# Altium PCB Control_Board_Model_C201_FFC_Sens_Conn.PcbDoc (part 12 of 12)
Units mil, origin at the board's own origin, x right, y up, seen from the top; angles counter-clockwise.
Board outline 3937.01 x 2755.91 mil, 6 copper layers (1-SIG-TOP, 2-GND, 3-PWR, 4-SIG-HOR, 5-SIG-VERT, 6-GND-BOT), stack 46.063 mil thick; 497 components, 379 nets, 1804 pads, 1610 vias.
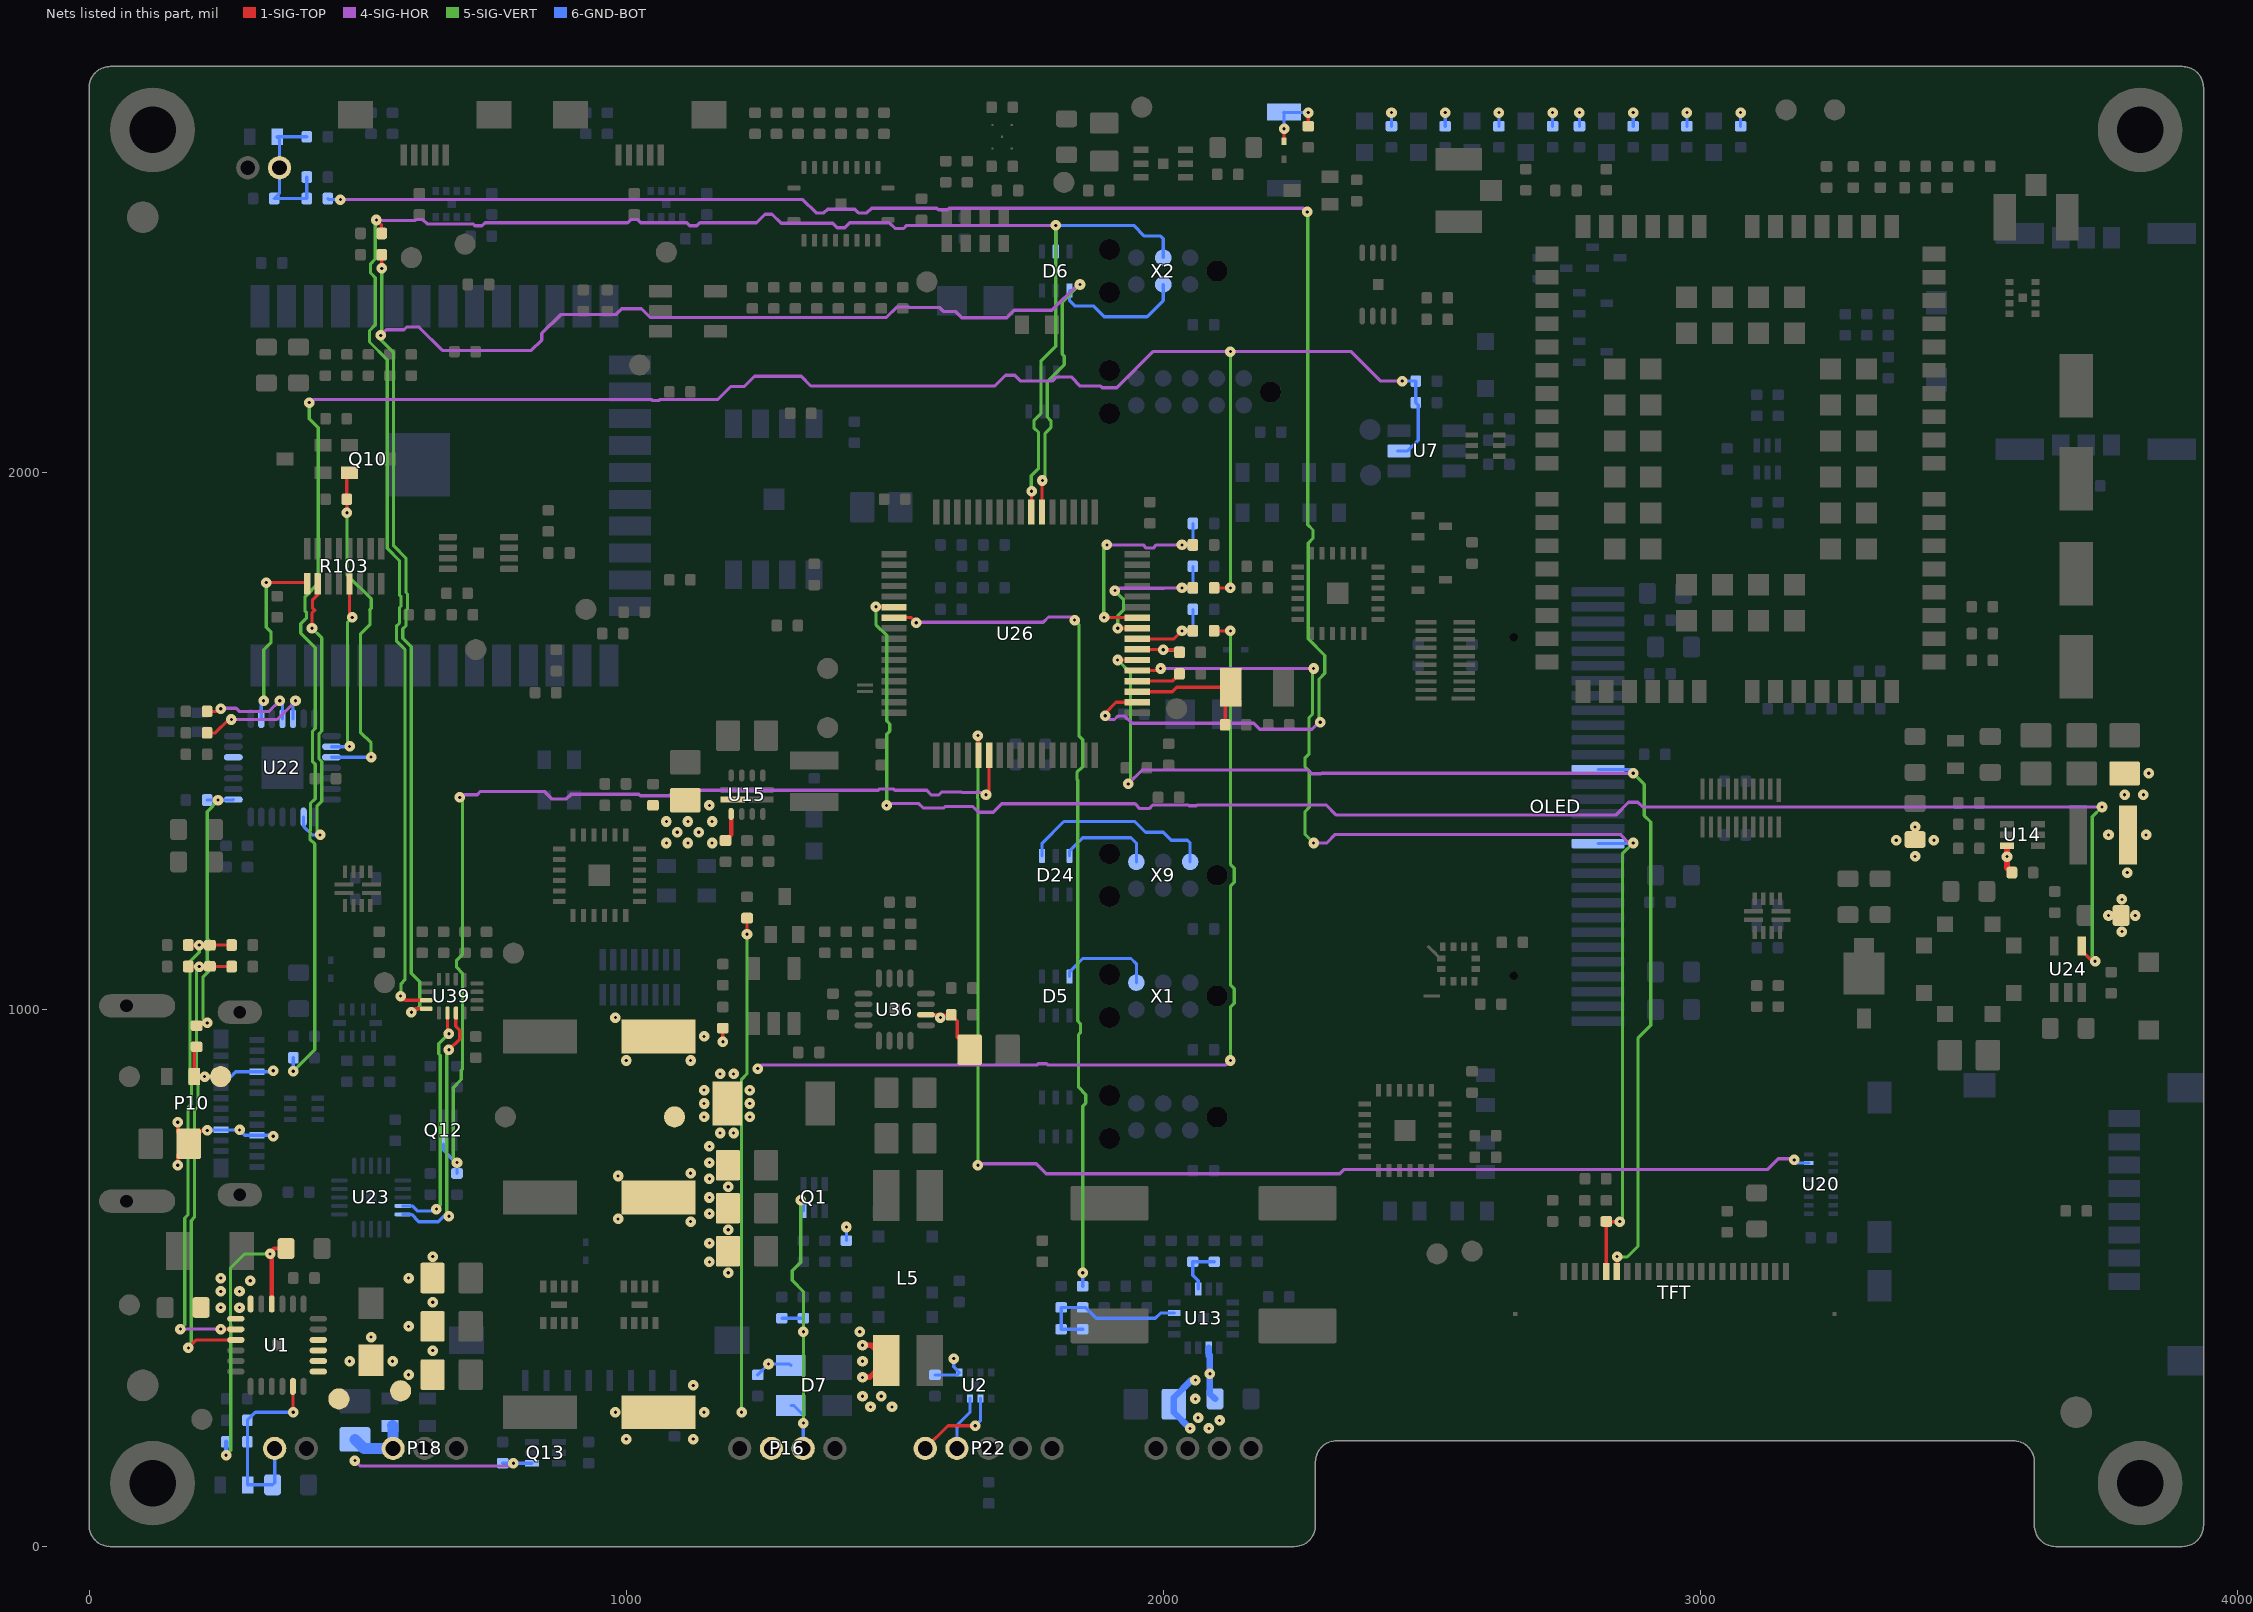
[diagram p11: the nets of this part, all layers, seen from the top]

## Via types
v1: diameter 19.68, hole 5.91, 1-SIG-TOP to 6-GND-BOT, tented both sides, 1553 vias
v2: diameter 23.81, hole 11.81, 1-SIG-TOP to 6-GND-BOT, tented both sides, 27 vias
v3: diameter 23.82, hole 11.81, 1-SIG-TOP to 6-GND-BOT, tented both sides, 26 vias
v4: diameter 21.65, hole 7.87, 1-SIG-TOP to 6-GND-BOT, tented both sides, 4 vias

## Nets (pads, with @x,y where several pads share a name; then routed paths per layer and width w, separated by ;. In a path a pad name is that pad's centre, name@x,y a point inside that pad or via, vN(x,y) a via of type N, cw(c..) or ccw(c..) an arc to the next point about the centre after c; other vN are vias at no path point) (continued)
PC0: C110.2 R134.2 R137.2 U26.8 | length 170.5
  1-SIG-TOP w6: U26.8@1951.38,1690.16 1951.54,1690 2020,1690 v1(2035,1705) R134.2@2055.31,1705
  6-GND-BOT w6: v1(2035,1705) R137.2@2055.31,1705 C110.2@2055.31,1745
PC1: C109.2 R133.2 R136.2 U26.9 | length 325.4
  1-SIG-TOP w6: v1(1915.16,1709.84) U26.9@1951.38,1709.84 ; v1(2035,1785) R133.2@2055.31,1785
  4-SIG-HOR w6: v1(1910,1780) 1914.69,1784.69 1915.18,1784.2 2001.54,1784.2 2002.34,1785 v1(2035,1785)
  5-SIG-VERT w6: v1(1910,1780) 1925.8,1764.2 1925.8,1743.46 1915.16,1732.82 v1(1915.16,1709.84)
  6-GND-BOT w6: v1(2035,1785) C109.2@2055.31,1785 R136.2@2055.31,1825
PC2: C111.2 R139.2 R140.2 U26.10 | length 424.8
  1-SIG-TOP w6: v1(1890,1730) 1950.91,1730 U26.10@1951.38,1729.53 ; v1(2035,1865) R139.2@2055.31,1865
  4-SIG-HOR w6: v1(1895,1865) 1962.66,1865 1968.46,1859.2 1981.54,1859.2 1987.34,1865 v1(2035,1865)
  5-SIG-VERT w6: v1(1890,1730) 1889.16,1730.84 1889.16,1859.16 v1(1895,1865)
  6-GND-BOT w6: v1(2035,1865) R140.2@2055.31,1865 C111.2@2055.31,1905
PC4: D6.1 R13.2 U26.22 U39.8 X2.3 | length 3637.8
  1-SIG-TOP w6: R13.2@544.69,2405 545,2405.32 v1(545,2380) ; v1(600,995) 606.38,1001.38 U39.8@627.76,1001.38 ; U26.22@1774.21,1926.38 1774.21,1984.21 v1(1775,1985)
  4-SIG-HOR w6: v1(542.91,2255.15) 553.6,2265.84 586.37,2265.84 591.37,2270.84 614.16,2270.84 657.84,2227.16 823.6,2227.16 842.84,2246.4 842.84,2258.9 877.94,2294 980.58,2294 991.43,2304.84 1028.57,2304.84 1044.91,2288.51 1484.2,2288.51 1503.49,2307.8 1526.51,2307.8 1527.07,2307.24 1583.33,2307.24 1590.74,2299.83 1612.71,2299.83 1624.54,2288 1708.67,2288 1722.5,2301.83 1792.68,2301.83 1792.78,2301.72 1841.06,2350 v1(1845,2350)
  5-SIG-VERT w6: v1(545,2380) 545,2257.24 v1(542.91,2255.15) 542.91,2247.09 567,2223 567,1863.52 590,1840.52 590,1776.45 592.84,1773.6 592.84,1746.4 590,1743.55 590,1714.48 584.16,1708.63 584.16,1691.37 600,1675.52 600,1067.34 615.8,1051.54 615.8,1005.8 605,995 v1(600,995) ; v1(1775,1985) 1780,1990 1780,2072.66 1790.8,2083.46 1790.8,2096.54 1784.18,2103.16 1784.18,2169.18 1815.8,2200.8 1815.8,2216.54 1812,2220.34 1812,2317 v1(1845,2350)
  6-GND-BOT w6: v1(1845,2350) 1833.78,2338.78 D6.1@1825.59,2338.78 1825.59,2319.41 1835,2310 1870,2310 1890,2290 1970,2290 2000,2320 X2.3@2000,2350
PC5: D6.5 R12.2 U26.23 U39.7 X2.4 | length 3740.8
  1-SIG-TOP w6: v1(535,2470) 544.69,2460.32 R12.2@544.69,2445 ; v1(580,1025) 587.87,1017.13 U39.7@627.76,1017.13 ; U26.23@1754.53,1926.38 1754.53,1964.53 v1(1755,1965)
  4-SIG-HOR w6: v1(535,2470) 536.05,2468.95 606.61,2468.95 608.46,2470.8 621.54,2470.8 629.5,2462.84 714.82,2462.84 718.46,2459.2 731.54,2459.2 737.34,2465 1002.66,2465 1008.46,2470.8 1021.54,2470.8 1027.34,2465 1112.66,2465 1118.46,2459.2 1131.54,2459.2 1137.34,2465 1242.66,2465 1258.46,2480.8 1271.54,2480.8 1288.51,2463.83 1384.88,2463.83 1393.05,2455.66 1406.95,2455.66 1416.29,2465 1490,2465 1500.8,2454.2 1516.54,2454.2 1522.34,2460 v1(1800,2460)
  5-SIG-VERT w6: v1(535,2470) 533,2468 533,2397.48 524.16,2388.63 524.16,2371.37 533,2362.52 533,2274.72 522.07,2263.79 522.07,2242.93 555,2210 555,1858.55 578,1835.55 578,1771.48 580.84,1768.63 580.84,1751.37 578,1748.52 578,1719.45 572.16,1713.6 572.16,1686.4 588,1670.55 588,1055.34 580.84,1048.18 580.84,1025.84 v1(580,1025) ; v1(1755,1965) 1754.16,1965.84 1754.16,1994.16 1768,2008 1768,2074.34 1759.2,2083.13 1759.2,2096.54 1772.18,2109.51 1772.18,2207.18 1800,2235 v1(1800,2460)
  6-GND-BOT w6: D6.5@1800,2411.22 v1(1800,2460) 1945,2460 1965,2440 1995,2440 2000,2435 X2.4@2000,2400
PC6: U24.4 U26.38 | length 3064.4
  1-SIG-TOP w6: v1(1465,1750) 1465.79,1749.21 U26.38@1498.62,1749.21 ; U24.4@3710.59,1118.31 3710.59,1109.41 3730,1090 v1(3735,1090)
  4-SIG-HOR w6: v1(1485,1380) 1488.8,1383.8 1544.23,1383.8 1552.82,1375.2 1591.48,1375.2 1594.28,1378 1645.55,1378 1656.4,1367.16 1683.6,1367.16 1699.45,1383 1947.52,1383 1956.37,1374.16 1973.63,1374.16 1980.32,1380.84 2046.82,1380.84 2048.46,1379.2 2061.54,1379.2 2063.18,1380.84 2303.63,1380.84 2322.48,1362 2842.52,1362 2866.37,1385.84 2883.63,1385.84 2892.48,1377 v1(3748,1377)
  5-SIG-VERT w6: v1(1465,1750) 1465,1716.65 1485,1696.65 1485,1537.34 1490.8,1531.54 1490.8,1518.46 1485,1512.66 v1(1485,1380) ; v1(3735,1090) 3730,1095 3730,1359 v1(3748,1377)
PC7: R78.2 U26.39 | length 1611.3
  1-SIG-TOP w6: U26.39@1498.62,1729.53 1499.09,1730 1530,1730 v1(1540,1720)
  4-SIG-HOR w6: v1(1540,1720) 1541.05,1721.05 1776.57,1721.05 1786.37,1730.84 1829.16,1730.84 v1(1835,1725)
  5-SIG-VERT w6: v1(1835,1725) 1843,1717 1843,1509.66 1850,1502.66 1850,1452.34 1839.2,1441.54 1839.2,1428.46 1840.8,1426.87 1840.8,978.68 1845.84,973.63 1845.84,956.37 1842,952.52 1842,854.9 1842.43,854.9 1855.8,841.54 1855.8,825.8 1850,820 v1(1850,510)
  6-GND-BOT w6: R78.2@1850,484.68 v1(1850,510)
PC11: U20.7 U26.53 | length 2408.7
  1-SIG-TOP w6: v1(1655,1510) 1656.1,1508.9 U26.53@1656.1,1473.62
  4-SIG-HOR w6: v1(1655,710) 1657.84,712.84 1763.6,712.84 1782.29,694.16 2328.63,694.16 2336.32,701.84 3124.5,701.84 3144.93,722.28 3172.72,722.28 v1(3175,720)
  5-SIG-VERT w6: v1(1655,710) 1655,1392.66 1654.2,1393.46 1654.2,1406.54 1655,1407.34 v1(1655,1510)
  6-GND-BOT w6: v1(3175,720) 3180.63,714.37 U20.7@3202.36,714.37
PC12: Q12.5 R115.2 U26.54 | length 1853.6
  1-SIG-TOP w6: v1(1670,1400) 1675.79,1405.79 U26.54@1675.79,1473.62
  4-SIG-HOR w6: v1(690,1395) 694.99,1399.99 722.77,1399.99 728.78,1406 847.55,1406 861.4,1392.16 888.6,1392.16 897.45,1401 1023.61,1401 1026.46,1398.16 1080.13,1398.16 1090.13,1408.16 1469.56,1408.16 1472.23,1410.83 1497.77,1410.83 1500.44,1408.16 1559.5,1408.16 1568.46,1399.2 1581.54,1399.2 1587.34,1405 1624.24,1405 1625.07,1404.17 1665.83,1404.17 v1(1670,1400)
  5-SIG-VERT w6: v1(685,715) 677.83,722.17 677.83,854.45 693,869.63 693,886.6 695,888.6 695,1067.66 684.2,1078.46 684.2,1091.54 695,1102.34 695,1390 v1(690,1395)
  6-GND-BOT w6: Q12.5@660,749.8 660,737.67 682.67,715 v1(685,715) R115.2@685,694.68
PC13: R29.1 U26.2 | length 3321.2
  1-SIG-TOP w6: v1(1891.98,1546.98) 1891.98,1551.98 1912.05,1572.05 U26.2@1951.38,1572.05
  4-SIG-HOR w6: v1(468,2508) 1328.9,2508 1353.68,2483.22 1368.22,2483.22 1375,2490 1425.64,2490 1432.42,2483.22 1448.22,2483.22 1457,2492 1578.52,2492 1581.37,2489.16 1598.63,2489.16 1601.48,2492 2261.31,2492 v1(2268.31,2485) ; v1(1891.98,1546.98) 1898.95,1540 1909.31,1540 1915.58,1546.27 1928.67,1546.27 1942.1,1532.84 2168.6,1532.84 2179.45,1522 2277,1522 2290,1535 v1(2292.5,1535)
  5-SIG-VERT w6: v1(2268.31,2485) 2269.16,2484.16 2269.16,1902.49 2278.84,1892.8 2278.84,1877.2 2270,1868.35 2270,1690 2300.84,1659.16 2300.84,1625.84 2290,1615 2290,1535 v1(2292.5,1535)
  6-GND-BOT w6: R29.1@444.69,2510 446.69,2508 v1(468,2508)
PC14: C12.2 U26.3 X3.1 | length 252.2
  1-SIG-TOP w6: U26.3@1951.38,1591.73 2016.73,1591.73 2025,1600 X3.1@2125.79,1600 2115.31,1589.53 C12.2@2115.31,1530
PC15: R20.2 U26.4 | length 84.6
  1-SIG-TOP w6: U26.4@1951.38,1611.42 2016.73,1611.42 R20.2@2030.31,1625
PF0: OLED.13 R7.2 TFT.18 U26.5 | length 2182.6
  1-SIG-TOP w6: U26.5@1951.38,1631.1 1991.1,1631.1 v1(1995,1635) ; TFT.18@2824.8,511.81 2824.8,604.88 2824.68,605 v1(2850,605)
  4-SIG-HOR w6: v1(1995,1635) v1(2280,1635) ; v1(2280,1310) 2304.48,1310 2320.48,1326 2851.14,1326 2867.14,1310 v1(2875,1310)
  5-SIG-VERT w6: v1(2280,1310) 2264.16,1325.84 2264.16,1368.63 2272,1376.48 2272,1443.52 2264.16,1451.37 2264.16,1468.63 2271.66,1476.13 2271.66,1543.63 2278,1549.98 2278,1633 v1(2280,1635) ; v1(2850,605) 2855,610 2855,1290 v1(2875,1310)
  6-GND-BOT w6: OLED.13@2809.84,1309.06 2874.06,1309.06 v1(2875,1310)
PF1: OLED.18 TFT.17 U26.6 | length 2283.7
  1-SIG-TOP w6: v1(1915,1650.79) U26.6@1951.38,1650.79 ; TFT.17@2844.49,511.81 2845,512.32 v1(2845,540)
  4-SIG-HOR w6: v1(1935,1420) 1961,1446 2269.52,1446 2276.37,1439.16 2293.63,1439.16 2294.48,1440 v1(2875,1440)
  5-SIG-VERT w6: v1(1915,1650.79) 1938.95,1626.83 1938.95,1423.95 v1(1935,1420) ; v1(2845,540) 2845.84,539.16 2863.63,539.16 2884.16,559.68 2884.16,947.19 2907.84,970.87 2907.84,1349.13 2895.84,1361.13 2895.84,1419.16 v1(2875,1440)
  6-GND-BOT w6: OLED.18@2809.84,1446.85 2873.15,1446.85 2875,1445 v1(2875,1440)
PG10: C108.1 R132.2 U26.7 | length 113.6
  1-SIG-TOP w6: U26.7@1951.38,1670.47 1999.53,1670.47 v1(2000,1670) 2025.31,1670 R132.2@2030.31,1665
  6-GND-BOT w6: v1(2000,1670) 2025.31,1670 C108.1@2030.31,1665
PIN#2_P022: D24.4 X9.2 | length 367.2
  6-GND-BOT w6: D24.4@1774.41,1286.22 1774.41,1309.41 1815,1350 1946.97,1350 1966.97,1330 2000,1330 2015,1315 2045,1315 2050,1310 X9.2@2050,1275
PIN#6_P012: D5.6 X1.6 | length 183
  6-GND-BOT w6: D5.6@1825.59,1061.22 1825.59,1070.59 1850,1095 1940,1095 1950,1085 X1.6@1950,1050
PIN#6_P022: D24.6 X9.6 | length 183
  6-GND-BOT w6: D24.6@1825.59,1286.22 1825.59,1295.59 1850,1320 1940,1320 1950,1310 X9.6@1950,1275
REF: C52.2 R78.1 R81.1 R82.2 U13.11 | length 303.6
  6-GND-BOT w6: C52.2@1850,404.68 R82.2@1810,404.68 R81.1@1810,445.32 R78.1@1850,445.32 1854.69,445.32 1875,425 1985.2,425 1995.04,434.84 U13.11@2020.47,434.84
REGN: C3.2 R3.1 U1.22 | length 589.6
  1-SIG-TOP w8: U1.22@340.16,451.18 U1.22@340.16,451.77 340.16,550.16 345,555 C3.2@366.54,555
  5-SIG-VERT w6: v1(255,170) 263.83,178.83 263.83,412.8 263.05,413.58 263.05,518.05 290,545 v1(337,545)
  6-GND-BOT w8: v1(255,170) 255.31,170.32 R3.1@255.31,195
RI/CLK: R103.2 U22.2 | length 547.8
  1-SIG-TOP w6: v1(415,1710) 415,1738.35 420,1743.35 416.16,1747.2 416.16,1762.8 425.79,1772.43 R103.2@425.79,1792.5
  5-SIG-VERT w6: v1(415,1710) 433.16,1691.84 433.16,1518.54 428.16,1513.54 428.16,1466.46 433,1461.61 433,1387.48 424.16,1378.63 424.16,1330.84 v1(430,1325)
  6-GND-BOT w6: U22.2@399.37,1358.5 399.37,1340.63 415,1325 v1(430,1325)
RXT: R105.1 U22.18 | length 184
  1-SIG-TOP w6: R105.1@219.69,1555 240,1555 v1(245,1560)
  4-SIG-HOR w6: v1(245,1560) 245.84,1560.84 273.63,1560.84 279.48,1555 335,1555 v1(355,1575)
  6-GND-BOT w6: v1(355,1575) 360,1570 U22.18@360,1541.5
SBU1: U23.15 U39.11 | length 488.9
  1-SIG-TOP w6: v1(670,925) 690,945 690,961.65 682.87,968.77 U39.11@682.87,993.5
  5-SIG-VERT w6: v1(670,615) 665.83,619.17 665.83,920.83 v1(670,925)
  6-GND-BOT w6: U23.15@584.06,618.5 600.5,618.5 614,605 650,605 660,615 v1(670,615)
SBU2: U23.14 U39.10 | length 447.7
  1-SIG-TOP w6: U39.10@667.13,993.5 667.13,957.13 670,954.25 v1(670,955)
  5-SIG-VERT w6: v1(646.68,628.32) 647,628.32 653.83,635.15 653.83,914.55 651.17,917.2 651.17,936.17 v1(670,955)
  6-GND-BOT w6: U23.14@584.06,634.25 601.72,634.25 610.97,625 643.35,625 v1(646.68,628.32)
SCL_OUT: P22.1 U2.2 | length 165.7
  1-SIG-TOP w6: P22.1@1556.89,182.68 1599.21,225 v1(1650,225)
  6-GND-BOT w6: v1(1650,225) 1659.84,234.84 U2.2@1659.84,275.98
SDA_OUT: P22.2 U2.3 | length 103.3
  6-GND-BOT w6: P22.2@1615.94,182.68 1615.94,225.94 1640.16,250.16 U2.3@1640.16,275.98
SENSE: D7.3 P16.3 Q1.6 R22.2 R25.2 | length 614.9
  5-SIG-VERT w6: v1(1325,645) 1325,529.48 1309.16,513.63 1309.16,495.84 1330,475 v1(1330,400) v1(1330,230)
  6-GND-BOT w6: R25.2@1290,425.32 R22.2@1330,425.32 v1(1330,400) ; D7.3@1306.69,262.6 1312.4,262.6 1330,245 v1(1330,230) 1329.53,230.47 P16.3@1329.53,182.68 ; v1(1325,645) 1330,645 1330.31,644.68 Q1.6@1330.31,624.8
STBY/R\E\S\E\T\: C51.2 R79.1 U13.14 | length 95
  6-GND-BOT w6: U13.14@2065.16,479.53 2065.16,494.84 2055,505 R79.1@2055,530.32 C51.2@2095,530.32
SUSP: U22.12
TAMP+: C20.1 D9.1 R28.2 R29.2 R30.1 X4.1 | length 277.5
  6-GND-BOT w6: R30.1@405.31,2550 R29.2@405.31,2510 C20.1@344.69,2510 354.53,2519.84 X4.1@354.53,2567.32 354.53,2620.08 349.61,2625 D9.1@350.59,2625 R28.2@405.31,2625
TS: D2.1 P19.1 P19.1.1 R2.2 R3.2 U1.11 | length 376.2
  1-SIG-TOP w6: U1.11@379.53,298.82 U1.11@379.53,298.23 379.53,250.47 v1(380,250)
  6-GND-BOT w6: P19.1.1@345.47,182.68 345.47,118.94 P19.1@341.54,115 D2.1@295.59,115 294.69,115.91 R3.2@294.69,195 R2.2@294.69,235 309.69,250 v1(380,250)
TXT: R104.1 U22.19 | length 225.3
  1-SIG-TOP w6: R104.1@219.69,1515 235,1515 260,1540 v1(265,1540)
  4-SIG-HOR w6: v1(265,1540) 350,1540 384.32,1574.32 v1(384.32,1575)
  6-GND-BOT w6: U22.19@379.69,1541.5 379.69,1570.37 v1(384.32,1575)
UART0.CTS: R103.5 U22.23 | length 352.4
  1-SIG-TOP w6: R103.5@484.84,1792.5 484.84,1735.16 v1(490,1730)
  5-SIG-VERT w6: v1(485,1490) 481.16,1493.84 481.16,1721.16 v1(490,1730)
  6-GND-BOT w6: U22.23@451.5,1489.37 489.37,1489.37 488.74,1490 v1(485,1490)
UART0.RTS: Q10.2 R63.1 U22.24 | length 650.2
  1-SIG-TOP w6: v1(480,1925) 480,1949.68 R63.1@479.69,1950 479.69,1994.53 Q10.2@484.57,1999.42
  5-SIG-VERT w6: v1(480,1925) 480,1809.85 525.37,1764.48 525.37,1746.84 522.49,1743.96 522.84,1743.6 522.84,1716.4 505.16,1698.71 505.16,1516.29 525,1496.45 v1(525,1470)
  6-GND-BOT w6: U22.24@451.5,1469.68 529.69,1469.68 529.37,1470 v1(525,1470)
USB4.D_N: R118.2 R119.2 R120.1 U1.3 | length 896.3
  1-SIG-TOP w6: R119.2@184.69,1080 v1(205,1080) R120.1@265.31,1080 ; v1(185,370) 199.84,384.84 U1.3@273.23,384.84
  5-SIG-VERT w6: v1(185,370) 190.17,375.17 190.17,606.8 196.17,612.8 196.17,812.8 202.8,819.42 202.8,864.87 199.2,868.46 199.2,881.54 200,882.34 200,1075 v1(205,1080)
USB4.D_P: R116.2 R117.1 R118.1 U1.2 | length 918
  1-SIG-TOP w6: R116.2@184.69,1120 v1(205,1120) R117.1@265.31,1120 ; v1(245,405) 245.47,404.53 U1.2@273.23,404.53
  4-SIG-HOR w6: v1(170,405) v1(245,405)
  5-SIG-VERT w6: v1(170,405) 178.17,413.17 178.17,611.77 184.17,617.77 184.17,817.77 190.8,824.39 190.8,859.9 187.2,863.49 187.2,886.51 188,887.31 188,1070.37 186.17,1072.2 186.17,1087.8 205,1106.63 v1(205,1120)
VBAT: C5.2 D1.1 P18.1 Q13.4 R135.2 TP16.1 U1.13 U1.14 | length 477.2
  4-SIG-HOR w6: v1(495,160) 505,150 785,150 v1(790,155)
  6-GND-BOT w6: R135.2@770,155.32 789.69,155.32 v1(790,155) Q13.4@824.8,155
  6-GND-BOT w20: C5.2@495,199.57 511.89,182.68 P18.1@565.94,182.68 565.94,224.45 D1.1@565,225.39
VBUS: C1.2 C21.1 C96.1 D21.1 P10.A4 P10.A9 P10.B4 P10.B9 R42.1 R102.2 R125.1 R133.1 TP17.1 U1.1 U1.24 U7.5 | length 4649.3
  1-SIG-TOP w6: v1(165,710) 165,729.57 C96.1@185.43,750 ; v1(165,790) 165,770.43 C96.1@185.43,750 ; R102.2@200,930.32 195.59,925.91 D21.1@195.59,875 v1(215,875) TP17.1@245,875 ; v1(220,775) 210.43,775 C96.1@185.43,750 ; U1.24@300.79,451.77 U1.24@300.79,460.79 ; R133.1@2094.69,1785 v1(2125,1785)
  4-SIG-HOR w6: v1(410,2130) 416.05,2136.05 1046.61,2136.05 1048.46,2134.2 1061.54,2134.2 1063.39,2136.05 1171.05,2136.05 1195,2160 1220,2160 1239,2179 1326,2179 1344,2161 1686.52,2161 1706.37,2180.84 1723.63,2180.84 1734.48,2170 1793.03,2170 1800.87,2177.84 1828.6,2177.84 1845.6,2160.84 1883.42,2160.84 1886.6,2157.66 1913.4,2157.66 1980.74,2225 v1(2125,2225) 2350,2225 2405,2170 v1(2445,2170)
  5-SIG-VERT w6: v1(380,885) 420,925 420,1308.37 411.17,1317.2 411.17,1332.8 412.16,1333.78 412.16,1383.6 421,1392.45 421,1456.64 416.16,1461.48 416.16,1518.52 421.16,1523.52 421.16,1673.84 394.16,1700.84 394.16,1718.63 405,1729.48 405,1738.55 402.16,1741.4 402.16,1768.6 426.84,1793.29 426.84,2083.16 410,2100 v1(410,2130) ; v1(2125,1785) v1(2125,2225)
  6-GND-BOT w6: v1@211.57,875 v1(215,875) ; v1@215,874.21 P10.B4@245.67,874.21 263.21,874.21 273.06,884.06 P10.A9@312.6,884.06 341.06,884.06 v1(343,886) ; v1(220,775) 219.21,775.79 P10.B9@245.67,775.79 v1(280.16,775.79) 290,765.94 P10.A4@312.6,765.94 341.06,765.94 v1(343,764) ; v1(380,885) 380.31,885.32 R125.1@380.31,910 ; U7.5@2436.85,2040.01 U7.5@2438.82,2040.01 2455.01,2040.01 2475,2060 2475,2125.32 C21.1@2470.32,2130 R42.1@2470.32,2170 v1(2445,2170)
  other v1: 245,445 280,445 245,475 280,475 300,495 245,500
VBUS_IN: R102.1 R107.1 U22.8 | length 508.3
  1-SIG-TOP w6: R102.1@200,969.68 205.31,975 v1(220,975)
  5-SIG-VERT w6: v1(220,975) 212,983 212,1060.37 223.83,1072.2 223.83,1087.8 220,1091.63 220,1108.37 223.83,1112.2 223.83,1127.8 220,1131.63 220,1368.41 240.8,1389.2 v1(240,1390)
  6-GND-BOT w6: R107.1@219.69,1390 v1(240,1390) 267.56,1390 U22.8@268.5,1390.94
VFAN: C13.1 C14.1 C15.1 C136.2 C137.2 C138.2 D23.1 P16.2 R134.1 R168.2 TP11.1 | length 2654.8
  1-SIG-TOP w6: v1(1225,1140) R168.2@1225,1170.32 ; R134.1@2094.69,1705 v1(2125,1705)
  4-SIG-HOR w6: v1(1245,890) 1251.84,896.84 1765.22,896.84 1767.2,898.83 1782.8,898.83 1784.78,896.84 2116.84,896.84 v1(2125,905)
  5-SIG-VERT w6: v1(1215,250) 1215,870 1225,880 v1(1225,1140) ; v1(2125,905) 2125,1004.26 2132.34,1011.6 2132.34,1038.4 2125,1045.74 2125,1229.26 2132.34,1236.6 2132.34,1263.4 2125,1270.74 v1(2125,1705)
  other v1: 1000,200 1125,200 980,250 1145,250 1125,300 1190,510 1155,530 1155,565 1190,590 1120,605 985,610 1155,620 1155,650 1190,670 1155,685 985,690 1120,695 1155,715 1155,745 1175,770 1200,770 1145,800 1230,800 1145,825 1230,825 1145,850 1230,850 1175,880 1200,880 1000,905 1120,905 1145,950 980,985
VSYS: C6.2 C7.2 C8.2 C17.1 C18.2 C19.1 C54.1 C55.1 C57.1 C58.1 C61.1 C62.2 C130.2 C131.2 D7.4 D8.1 FB1.2 FB4.1 FB6.1 L1.2 L2.1 L5.3 P24.1 R27.1 R32.2 R33.2 R34.2 R35.2 R43.2 R44.2 R45.1 R46.2 R96.2 TP15.1 U1.15 U1.16 U2.5 U13.6 U14.3 U15.7 U15.8 U36.2 | length 1116.4
  1-SIG-TOP w6: v1(1180,940) FB6.1@1180,965.32 FB6.1@1180,967.28 ; U36.2@1558.07,990.16 1578.07,990.16 1583.23,985 v1(1585,985) v1@1585,990 ; v1@1587.5,987.5 v1@1585,990 ; C130.2@1639.57,925 1616.66,947.91 1616.66,978.66 C131.2@1605.31,990 v1@1585,990 ; D8.1@2225,2616.54 v1(2225,2640) ; C19.1@2270,2644.68 v1(2270,2670)
  1-SIG-TOP w8: C62.2@1185,1314.68 1195.47,1325.16 U15.8@1195.47,1364.07
  1-SIG-TOP w10: v1(1440,315) 1453.19,315 L5.3@1484.65,346.46 1456.1,375 v1(1440,375)
  1-SIG-TOP w12: U14.3@3571.06,1305.32 v1(3571.06,1284.78) 3571.06,1264.25 C58.1@3580.32,1255
  6-GND-BOT w6: C18.2@1245,319.68 1245,320 v1(1265,340) 1304.1,340 D7.4@1306.69,337.41 ; R27.1@1410,569.68 v1(1410,595) ; C17.1@1575,319.68 1616.14,319.68 U2.5@1620.47,324.02 1610,334.49 v1(1610,350) ; P24.1@2224.13,2670 P24.1@2225,2670.87 P24.1@2225,2670 ; v1(2225,2640) P24.1@2225,2670 ; v1(2270,2670) P24.1@2225,2670 ; R35.2@2425,2644.68 v1(2425,2670) ; R34.2@2525,2644.68 v1(2525,2670) ; R33.2@2625,2644.68 v1(2625,2670) ; R32.2@2725,2644.68 v1(2725,2670) ; R45.1@2775,2644.68 v1(2775,2670) ; R44.2@2875,2644.68 v1(2875,2670) ; R43.2@2975,2644.68 v1(2975,2670) ; R46.2@3075,2644.68 v1(3075,2670)
  6-GND-BOT w12: v1(2050,220) 2019.85,250.15 C54.1@2019.85,265 2019.85,277.19 2052.65,310 v1(2060,310) ; U13.6@2084.84,370.47 2084.84,354.88 2086.62,356.66 2086.62,349.27 2086.84,349.05 v1(2086.84,321.84) 2086.84,284.69 C55.1@2096.54,275
  other v1: 2085,220 2105,235 2065,240 1455,260 1495,260 2060,275 1440,280 1475,280 595,320 485,345 565,345 1440,345 640,365 525,390 1435,400 595,410 640,455 595,500 640,540 3785,1145 3760,1175 3810,1175 3785,1205 3795,1255 3400,1285 1075,1310 1115,1310 1160,1310 3365,1315 3435,1315 3760,1325 3830,1325 1095,1330 1135,1330 3400,1340 1075,1350 1115,1350 1160,1350 1155,1380 3790,1400 3825,1400 3835,1440
WKUP: R103.1 U22.16 | length 341.8
  1-SIG-TOP w6: v1(330,1795) 403.6,1795 R103.1@406.1,1792.5
  5-SIG-VERT w6: v1(325,1575) 325,1670 338.84,1683.84 338.84,1702.8 330,1711.65 v1(330,1795)
  6-GND-BOT w6: U22.16@320.63,1541.5 320.63,1570.63 v1(325,1575)
pads on no net: ESP32_MOD.32 FID1. FID2. FID3. OLED.0 OLED.7 P10.A2 P10.A3 P10.A10 P10.A11 P10.B2 P10.B3 P10.B10 P10.B11 R103.7 U1.8 U2.4 U6.2 U6.4 U6.5 U6.6 U6.7 U6.11 U6.12 U6.13 U6.14 U6.16 U6.24 U6.25 U6.26 U6.40 U6.41 U6.42 U6.51 U6.56 U6.57 U6.63 U6.64 U6.65 U6.66 U6.76 U6.77 U6.78 U6.83 U6.84 U6.85 U6.86 U6.87 U6.88 U6.92 U6.93 U6.94 U6.95 U6.97 U6.98 U6.99 U8.4 U9.4 U10.11 U10.12 U10.S5 U11.4 U12.4 U15.5 U20.2 U22.10 U22.13 U22.14 U22.15 U22.17 U22.20 U22.21 U22.22 U25.4 U32.4 U34.1 U34.2 U34.3 U34.7 U39.13 X1.0 X2.0 X8.0 X8.7 X8.9 X9.0 X10.0

## Polygon pours and split planes (outlines as drawn)
GND on 1-SIG-TOP "GND_L01_P112" (solid, pour order 112): 0,2755.91 3937.01,2755.91 3937.01,0 0,0
VBUS on 1-SIG-TOP "VBUS_L01_P107" (solid, pour order 107): 175,510 310,510 310,415 240,415 240,405 175,405
VFAN on 1-SIG-TOP "VFAN_L01_P108" (solid, pour order 108): 1125,500 1225,500 1225,765 1250,765 1250,900 1160,900 1160,1000 950,1000 950,600 1125,600
VSYS on 1-SIG-TOP "VSYS_L01_P103" (solid, pour order 103): 3350,1350 3450,1350 3450,1275 3350,1275
NetC59_2 on 1-SIG-TOP "NETC59_2_L01_P089" (solid, pour order 89): 3370,1480 3755,1480 3755,1400 3660,1400 3660,1335 3600,1335 3600,1375 3445,1375 3445,1355 3370,1355
NetL2_2 on 1-SIG-TOP "NETL2_2_L01_P088" (solid, pour order 88): 3625,1315 3670,1315 3670,1255 3735,1255 3735,1395 3670,1395 3670,1335 3625,1335
LCD_BL_A on 1-SIG-TOP "LCD_BL_A_L01_P097" (solid, pour order 97): 3380,1035 3380,1200 3225,1200 3225,1035
NetC92_2 on 1-SIG-TOP "NETC92_2_L01_P092" (solid, pour order 92): 3400,950 3400,870 3500,870 3500,1000 3435,1065 3385,1065 3385,1025 3275,1025 3275,950
NetC134_2 on 1-SIG-TOP "NETC134_2_L01_P094" (solid, pour order 94): 1520,890 1315,890 1315,750 1425,750 1425,590 1520,590
+3V3 on 1-SIG-TOP "+3V3_L01_P081" (solid, pour order 81): 1250,1560 1250,1420 1415,1420 1415,1560
NetR90_2 on 1-SIG-TOP "NETR90_2_L01_P096" (solid, pour order 96): 2125,420 2350,420 2350,350 2175,350 2175,320.08 2125,320.08
NetR89_2 on 1-SIG-TOP "NETR89_2_L01_P095" (solid, pour order 95): 1800,420 2025,420 2025,320.08 1975,320.08 1975,350 1800,350
NetC92_1 on 1-SIG-TOP "NETC92_1_L01_P091" (solid, pour order 91): 3500,870 3585,870 3585,995 3670,995 3670,1070 3570,1070 3500,1000
NetC90_2 on 1-SIG-TOP "NETC90_2_L01_P090" (solid, pour order 90): 3500,1250 3500,1150 3575,1075 3685,1075 3685,1140 3730,1140 3730,1215 3690,1215 3690,1205 3555,1205 3555,1250
NetC26_1 on 1-SIG-TOP "NETC26_1_L01_P086" (solid, pour order 86): 3395,1710 3395,1625 3525,1625 3525,1775 3475,1775 3475,1710
NetC25_1 on 1-SIG-TOP "NETC25_1_L01_P084" (solid, pour order 84): 3205,2400 3290,2400 3290,2495 3360,2495 3360,2550 3205,2550
VSYS on 1-SIG-TOP "VSYS_L01_P100" (solid, pour order 100): 3740,1395 3760,1395 3760,1480 3840,1480 3840,1255 3740,1255
NetC26_1 on 1-SIG-TOP "NETC26_1_L01_P087" (solid, pour order 87): 3625,1910 3765,1910 3765,1725 3625,1725
NetC25_1 on 1-SIG-TOP "NETC25_1_L01_P085" (solid, pour order 85): 3625,1910 3765,1910 3765,2070 3625,2070
VSYS on 1-SIG-TOP "VSYS_L01_P105" (solid, pour order 105): 1505,410 1505,250 1425,250 1425,410
LCD_BL_K on 1-SIG-TOP "LCD_BL_K_L01_P098" (solid, pour order 98): 3750,1000 3750,950 3800,950 3800,1000
LCD_BL_K on 1-SIG-TOP "LCD_BL_K_L01_P099" (solid, pour order 99): 3175,1000 3175,950 3225,950 3225,1000
VFAN on 1-SIG-TOP "VFAN_L01_P110" (solid, pour order 110): 960,310 1155,310 1155,185 960,185
VSYS on 1-SIG-TOP "VSYS_L01_P101" (solid, pour order 101): 3745,1215 3745,1135 3825,1135 3825,1215
NetC134_1 on 1-SIG-TOP "NETC134_1_L01_P093" (solid, pour order 93): 1520,970 1600,970 1600,725 1615,725 1615,590 1520,590
NetC2_2 on 1-SIG-TOP "NETC2_2_L01_P083" (solid, pour order 83): 365,440 480,440 480,405 570,405 570,540 365,540
VSYS on 1-SIG-TOP "VSYS_L01_P102" (solid, pour order 102): 415,395 575,395 575,550 670,550 670,275 600,275 600,300 480,300 480,360 415,360
VBAT on 1-SIG-TOP "VBAT_L01_P106" (solid, pour order 106): 415,355 475,355 475,295 600,295 600,145 440,145 440,320 415,320
VSYS on 1-SIG-TOP "VSYS_L01_P104" (solid, pour order 104): 1205,1400 1205,1300 1025,1300 1025,1400
+3V3 on 1-SIG-TOP "+3V3_L01_P080" (solid, pour order 80): 2025,2675 2135,2675 2135,2590 2025,2590
+3V3_AUX on 1-SIG-TOP "+3V3_AUX_L01_P082" (solid, pour order 82): 1775,2700 1975,2700 1975,2600 1775,2600
GND on 4-SIG-HOR "GND_L04_P118" (solid, pour order 118): 0,2755.91 3937.01,2755.91 3937.01,0 0,0
LCD_BL_A on 4-SIG-HOR "LCD_BL_A_L04_P117" (solid, pour order 117): 3250,1750 3300,1750 3300,1700 3250,1700
LCD_BL_K on 4-SIG-HOR "LCD_BL_K_L04_P116" (solid, pour order 116): 3175,1000 3175,950 3225,950 3225,1000
LCD_BL_K on 4-SIG-HOR "LCD_BL_K_L04_P114" (solid, pour order 114): 3750,1000 3750,950 3800,950 3800,1000
GND on 6-GND-BOT "GND_L06_P131" (solid, pour order 131): 0,2755.91 3937.01,2755.91 3937.01,0 0,0
VSYS on 6-GND-BOT "VSYS_L06_P129" (solid, pour order 129): 2125,325 2125,200 2025,200 2025,325
NetR89_2 on 6-GND-BOT "NETR89_2_L06_P127" (solid, pour order 127): 1975,375 2025,375 2025,320.08 1975,320.08
NetR90_2 on 6-GND-BOT "NETR90_2_L06_P125" (solid, pour order 125): 2125,375 2175,375 2175,320.08 2125,320.08
GND on 5-SIG-VERT "GND_L05_P123" (solid, pour order 123): 0,2755.91 3937.01,2755.91 3937.01,0 0,0
LCD_BL_A on 5-SIG-VERT "LCD_BL_A_L05_P121" (solid, pour order 121): 3250,1750 3300,1750 3300,1700 3250,1700
LCD_BL_A on 5-SIG-VERT "LCD_BL_A_L05_P119" (solid, pour order 119): 3275,1035 3275,1200 3225,1200 3225,1035
GND on 2-GND (split plane): 2603.35,216.95 2509.84,216.95 2509.84,306.1 2603.35,306.1
GND on 2-GND (split plane): 3901.42,2735.53 3905.05,2734.42 3908.4,2732.64 3911.33,2730.23 3913.74,2727.29 3915.53,2723.95 3916.63,2720.31 3916.96,2716.99 3916.91,2716.54 3916.91,2716.53 3916.91,39.37 3916.96,38.91 3916.63,35.59 3915.53,31.96 3913.74,28.61 3911.33,25.68 3908.4,23.27 3905.05,21.48 3901.42,20.38 3898.09,20.05 3897.64,20.1 3661.42,20.1 3660.96,20.05 3657.64,20.38 3654.01,21.48 3650.66,23.27 3647.73,25.68 3645.32,28.61 3643.53,31.96 3642.43,35.59 3642.1,38.91 3642.14,39.37 3642.14,157.48 3642.14,157.56 3641.77,164.14 3640.65,170.71 3638.8,177.12 3636.25,183.28 3633.03,189.12 3629.17,194.56 3624.72,199.53 3619.75,203.97 3614.31,207.83 3608.48,211.06 3602.32,213.61 3595.91,215.45 3589.33,216.57 3582.76,216.94 3582.68,216.95 2962.6,216.95 2962.6,311.02 2509.84,311.02 2504.92,311.02 2416.34,311.02 2416.34,216.95 2322.83,216.95 2322.75,216.94 2316.18,216.57 2309.6,215.45 2303.19,213.61 2297.03,211.06 2291.2,207.83 2285.76,203.97 2280.79,199.53 2276.34,194.56 2272.49,189.12 2269.26,183.28 2266.71,177.12 2264.86,170.71 2263.74,164.14 2263.38,157.56 2263.37,157.48 2263.37,39.37 2263.41,38.91 2263.09,35.59 2261.98,31.96 2260.19,28.61 2257.79,25.68 2254.85,23.27 2251.5,21.48 2247.87,20.38 2244.55,20.05 2244.09,20.1 39.37,20.1 38.91,20.05 35.59,20.38 31.96,21.48 28.61,23.27 25.68,25.68 23.27,28.61 21.48,31.96 20.38,35.59 20.05,38.91 20.1,39.37 20.1,1595 280,1595 280,2355 20.1,2355 20.1,2716.54 20.05,2716.99 20.38,2720.31 21.48,2723.95 23.27,2727.29 25.68,2730.23 28.61,2732.64 31.96,2734.42 35.59,2735.53 38.91,2735.85 39.37,2735.81 3897.64,2735.81 3898.09,2735.85
NetC25_1 on 3-PWR (split plane): 3395.92,2075 3396.23,2073.44 3397.12,2072.12 3398.44,2071.23 3400,2070.92 3770.92,2070.92 3770.92,2050 3770.92,1879.08 3390,1879.08 3388.44,1878.77 3387.12,1877.88 3386.23,1876.56 3385.92,1875 3385.92,1610 3386.23,1608.44 3387.12,1607.12 3470.92,1523.31 3470.92,1479.08 3304.08,1479.08 3304.08,1650 3303.77,1651.56 3302.88,1652.88 3301.56,1653.77 3300,1654.08 3204.08,1654.08 3204.08,2375 3204.08,2545.92 3395.92,2545.92
NetC26_1 on 3-PWR (split plane): 3770.92,1479.08 3479.08,1479.08 3479.08,1525 3478.77,1526.56 3478.33,1527.22 3477.88,1527.88 3394.08,1611.69 3394.08,1870.92 3770.92,1870.92
+1V8_BG95 on 3-PWR (split plane): 2645.92,1550 2646.23,1548.44 2647.12,1547.12 2648.44,1546.23 2650,1545.92 3200,1545.92 3201.56,1546.23 3202.88,1547.12 3203.77,1548.44 3204.08,1550 3204.08,1645.92 3295.92,1645.92 3295.92,1475 3295.92,1379.08 2529.08,1379.08 2529.08,1400 2529.08,1670.92 2645.92,1670.92
VSYS on 3-PWR (split plane): 2691.93,216.95 2598.43,216.95 2598.43,306.1 2691.93,306.1
VFAN on 3-PWR (split plane): 1150.92,900 1151.23,898.44 1152.12,897.12 1153.44,896.23 1155,895.92 1220.92,895.92 1220.92,300 1221.23,298.44 1222.12,297.12 1295.92,223.31 1295.92,129.08 954.08,129.08 954.08,995.92 1150.92,995.92
+1V8 on 3-PWR (split plane): 3195.92,2725 3195.92,2654.08 3129.08,2654.08 3129.08,2700 3128.77,2701.56 3127.88,2702.88 3126.56,2703.77 3125,2704.08 1775,2704.08 1773.44,2703.77 1772.12,2702.88 1748.31,2679.08 529.08,2679.08 529.08,2735.81 3195.92,2735.81
+3V3_AUX on 3-PWR (split plane): 1970.92,2604.08 1776.69,2604.08 1752.88,2627.88 1751.56,2628.77 1750,2629.08 1075,2629.08 1073.44,2628.77 1072.12,2627.88 1071.23,2626.56 1070.92,2625 1070.92,2529.08 529.08,2529.08 529.08,2670.92 1750,2670.92 1751.56,2671.23 1752.88,2672.12 1776.69,2695.92 1970.92,2695.92
VBUS on 3-PWR (split plane): 470.92,404.08 20.1,404.08 20.1,895.92 470.92,895.92
VSYS on 3-PWR (split plane): 229 vertices, not listed, extent 20.05,20.05 3916.96,2735.85
+3V3 on 3-PWR (split plane): 39.37,2735.81 520.92,2735.81 520.92,2525 521.23,2523.44 522.12,2522.12 523.44,2521.23 525,2520.92 1075,2520.92 1076.56,2521.23 1077.88,2522.12 1078.77,2523.44 1079.08,2525 1079.08,2620.92 1748.31,2620.92 1772.12,2597.12 1773.44,2596.23 1775,2595.92 1975,2595.92 1976.56,2596.23 1977.88,2597.12 1978.77,2598.44 1979.08,2600 1979.08,2695.92 2170.92,2695.92 2170.92,2625 2171.23,2623.44 2172.12,2622.12 2173.44,2621.23 2175,2620.92 2520.92,2620.92 2520.92,1400 2520.92,1375 2521.23,1373.44 2522.12,1372.12 2523.44,1371.23 2525,1370.92 3295.92,1370.92 3295.92,404.08 1454.08,404.08 1454.08,845.92 1675,845.92 1676.56,846.23 1677.88,847.12 1678.77,848.44 1679.08,850 1679.08,1025 1678.77,1026.56 1677.88,1027.88 1676.56,1028.77 1675,1029.08 1550,1029.08 1548.44,1028.77 1547.78,1028.33 1547.12,1027.88 1448.31,929.08 1281.58,929.08 1281.58,1030.62 1281.58,1415 1281.27,1416.56 1280.38,1417.88 1279.06,1418.77 1277.5,1419.08 1050,1419.08 1048.44,1418.77 1047.12,1417.88 1046.23,1416.56 1045.92,1415 1045.92,1300 1046.23,1298.44 1047.12,1297.12 1048.44,1296.23 1050,1295.92 1150.92,1295.92 1150.92,1004.08 950,1004.08 948.44,1003.77 947.12,1002.88 946.23,1001.56 945.92,1000 945.92,554.08 479.08,554.08 479.08,900 478.77,901.56 477.88,902.88 476.56,903.77 475,904.08 20.1,904.08 20.1,1590 300,1590 300,2375 20.1,2375 20.1,2716.54 20.05,2716.99 20.38,2720.31 21.48,2723.95 23.27,2727.29 25.68,2730.23 28.61,2732.64 31.96,2734.42 35.59,2735.53 38.91,2735.85

## Keep-outs
Keep-Out Layer:
  text "'.Layer_Name'" at 4724.41,492.13 h98.43

## Other copper
1-SIG-TOP:
  text "'.Layer_Name'" at 4724.41,2657.48 h98.43
4-SIG-HOR:
  text "'.Layer_Name'" at 4724.41,2362.2 h98.43
5-SIG-VERT:
  text "'.Layer_Name'" at 4724.41,2263.78 h98.43
6-GND-BOT:
  text "'.Layer_Name'" at 5314.96,2165.35 h98.43
2-GND (plane layer: these items are gaps in the copper):
  rectangle: 0,1595 280,2355
  text "'.Layer_Name'" at 4724.41,2559.06 h98.43
3-PWR (plane layer: these items are gaps in the copper):
  rectangle: 0,1590 300,2375
  lines w8: 0,400 225.94,400 475,400 475,900 0,900 ; 475,550 950,550 ; 525,2675 1750,2675 1775,2700 3125,2700 3125,2650 3200,2650 3200,2725 3200,2755.91 ; 525,2755.91 525,2525 1075,2525 1075,2625 1750,2625 1775,2600 1975,2600 1975,2700 ; 2175,2700 2175,2625 2525,2625 2525,1400 2525,1375 3300,1375 ; 2525,1675 2650,1675 2650,1550 3200,1550 3200,1650 ; 3375,1475 3775,1475 3775,1875 ; 3575,1875 3775,1875 ; 1155,1000 1155,900 1225,900 1225,300 1300,225 1300,125 1225,125 975,125 950,125 950,1000 1155,1000 ; 1155,1000 1155,1300 1050,1300 1050,1415 1155,1415 1277.5,1415 1277.5,1030.62 1277.5,925 1450,925 1550,1025 1675,1025 1675,850 1450,850 1450,400 3300,400 3300,1375 ; 3200,1650 3300,1650 3300,1475 ; 3200,1650 3200,2375 3200,2550 3400,2550 3400,2075 3775,2075 3775,2050 3775,1875 ; 3300,1375 3300,1475 ; 3300,1475 3475,1475 3475,1525 3390,1610 3390,1875 3775,1875
  text "'.Layer_Name'" at 4724.41,2460.63 h98.43

## Silkscreen, mask and mechanical layers (free items; w line width, h text height)
Top Overlay:
  text "'.Layer_Name'" at 4724.41,1181.1 h98.43
Bottom Overlay:
  text "'.Layer_Name'" at 5314.96,1082.68 h98.43
Top Paste:
  text "'.Layer_Name'" at 4724.41,984.25 h98.43
Bottom Paste:
  text "'.Layer_Name'" at 5314.96,885.83 h98.43
Top Solder:
  text "'.Layer_Name'" at 4724.41,787.4 h98.43
Bottom Solder:
  text "'.Layer_Name'" at 5314.96,688.98 h98.43
Drill Guide:
  text "'.Layer_Name'" at 4724.41,590.55 h98.43
Dimensions:
  text "'.Layer_Name'" at 4724.41,2066.93 h98.43
Fiducials:
  text "'.Layer_Name'" at 4724.41,1968.5 h98.43
Outline:
  the board outline again, w39.37
  text "'.Layer_Name'" at 4724.41,1870.08 h98.43
3D Body TOP:
  text "'.Layer_Name'" at 4724.41,1771.65 h98.43
TOP ASSY:
  text "'.Layer_Name'" at 4724.41,1673.23 h98.43
Courtyard TOP:
  text "'.Layer_Name'" at 4724.41,1574.8 h98.43
PCB Sheet:
  lines w27.56: -1412.6,-8000 -1412.6,3692.91 ; -1412.6,-5076.77 -1215.75,-5076.77 ; -1412.6,-2153.54 -1215.75,-2153.54 ; -1412.6,769.69 -1215.75,769.69 ; -1215.75,-6595 1367.2,-6595 2867.2,-6595 5870.87,-6595 ; -1215.75,3496.06 5870.87,3496.06 5870.87,-7803.15 -1215.75,-7803.15 -1215.75,3496.06 ; 284.53,-7803.15 284.53,-6595 ; 284.53,-7495 5870.87,-7495 ; 284.53,-7195 5870.87,-7195 ; 284.53,-6895 5870.87,-6895 ; 1149.21,-8000 1149.21,-7803.15 ; 1149.21,3496.06 1149.21,3692.91 ; 2467.2,-7803.15 2467.2,-7195 2467.2,-6595 ; 3508.66,-8000 3508.66,-7803.15 ; 3508.66,3496.06 3508.66,3692.91 ; 4567.2,-7803.15 4567.2,-7195 ; 5870.87,-5076.77 6067.72,-5076.77 ; 5870.87,-2153.54 6067.72,-2153.54 ; 5870.87,769.69 6067.72,769.69 ; -2200,-8000 -2200,3692.91 6067.72,3692.91 6067.72,-8000 -2200,-8000
  text "1" at -34.65,3555.12 h70
  text "2" at 2327.56,3555.12 h70
  text "3" at 4689.76,3555.12 h70
  text "A" at -1333.86,2132.87 h70
  text "A" at 5949.61,2132.87 h70
  text "'.Layer_Name'" at 4724.41,1476.38 h98.43
  text "B" at -1333.86,-790.35 h70
  text "B" at 5949.61,-790.35 h70
  text "C" at -1333.86,-3713.58 h70
  text "C" at 5949.61,-3713.58 h70
  text "D" at -1333.86,-6558.07 h70
  text "D" at 5949.61,-6558.07 h70
  text "ENGINEER:" at 334.53,-6695 h45
  text "PROJECT NAME:" at 2517.2,-6695 h45
  text "'.ProjectName'" at 3059.45,-6818.9 h118.11
  text "'._HWEngineer'" at 429.49,-6828.53 h60
  text "ACME CPU" at -1018.9,-6858.27 h196.85
  text "PCB DESIGNER:" at 334.53,-6990 h45
  text "BOARD NAME:" at 2517.2,-6990.28 h45
  text "'._CompanyName'" at -1018.9,-7055.12 h70
  text "'._BoardName'" at 3059.45,-7124.02 h118.11
  text "'._HWEngineer'" at 424.49,-7133.53 h60
  text "'._address1'" at -1018.9,-7251.97 h70
  text "DATE:" at 334.53,-7295 h45
  text "PART NO.:" at 2517.2,-7295 h45
  text "Ver:" at 4617.2,-7295 h45
  text "'._address2'" at -1018.9,-7350.39 h70
  text "'._Revision'" at 4975,-7400 h118.11
  text "'._DocumentDate'" at 424.49,-7403.53 h70
  text "'._PCBModel'" at 3059.45,-7429.13 h118.11
  text "'._address3'" at -1018.9,-7448.82 h50
  text "'._address4'" at -1018.9,-7547.24 h50
  text "FILE NAME:" at 334.53,-7595 h45
  text "SCH. NO.:" at 2517.2,-7595 h45
  text "SCALE:" at 4617.2,-7595 h45
  text "A4 M1:1" at 5000,-7700 h118.11
  text "'.ProjectNumber'" at 3059.45,-7724.41 h118.11
  text "'.Pcb_File_Name_No_Path'" at 427.01,-7729.87 h70
  text "1" at -34.65,-7940.94 h70
  text "2" at 2327.56,-7940.94 h70
  text "3" at 4689.76,-7940.94 h70
Drill Drawing:
  text "'.Layer_Name'" at 4724.41,393.7 h98.43
  text ".Legend" at -1181.1,-6299.21 h137.8
Courtyard BOT:
  text "'.Layer_Name'" at 5314.96,1377.95 h98.43
BOT ASSY:
  text "'.Layer_Name'" at 5314.96,1279.53 h98.43
Layer Stack:
  drawing of 610 lines, arcs and shapes, not listed
  text "'.Layer_Name'" at 4724.41,295.28 h98.43
  text "Layer" at -50.61,-1018.33 h60
  text "Name" at 359.3,-1018.33 h60
  text "Material" at 1289.05,-1018.33 h60
  text "Thickness" at 2148.81,-1018.33 h60
  text "Constant" at 2798.65,-1018.33 h60
  text "Board Layer Stack" at 3368.51,-1018.33 h60
  text "1" at -50.61,-1138.33 h60
  text "Top Overlay" at 359.3,-1138.33 h60
  text "2" at -50.61,-1258.33 h60
  text "Top Solder" at 359.3,-1258.33 h60
  text "Solder Resist" at 1289.05,-1258.33 h60
  text "0.020mm" at 2148.81,-1258.33 h60
  text "3.5" at 2798.65,-1258.33 h60
  text "3" at -50.61,-1378.33 h60
  text "1-SIG-TOP" at 359.3,-1378.33 h60
  text "Copper" at 1289.05,-1378.33 h60
  text "0.035mm" at 2148.81,-1378.33 h60
  text "4" at -50.61,-1498.33 h60
  text "Dielectric 1" at 359.3,-1498.33 h60
  text "FR-4" at 1289.05,-1498.33 h60
  text "0.105mm" at 2148.81,-1498.33 h60
  text "4.29" at 2798.65,-1498.33 h60
  text "5" at -50.61,-1618.33 h60
  text "2-GND" at 359.3,-1618.33 h60
  text "Copper" at 1289.05,-1618.33 h60
  text "0.035mm" at 2148.81,-1618.33 h60
  text "6" at -50.61,-1738.33 h60
  text "Dielectric 3" at 359.3,-1738.33 h60
  text "FR-4" at 1289.05,-1738.33 h60
  text "0.300mm" at 2148.81,-1738.33 h60
  text "3.96" at 2798.65,-1738.33 h60
  text "7" at -50.61,-1858.33 h60
  text "3-PWR" at 359.3,-1858.33 h60
  text "Copper" at 1289.05,-1858.33 h60
  text "0.035mm" at 2148.81,-1858.33 h60
  text "8" at -50.61,-1978.33 h60
  text "Dielectric 2" at 359.3,-1978.33 h60
  text "FR-4" at 1289.05,-1978.33 h60
  text "0.150mm" at 2148.81,-1978.33 h60
  text "4.29" at 2798.65,-1978.33 h60
  text "9" at -50.61,-2098.33 h60
  text "4-SIG-HOR" at 359.3,-2098.33 h60
  text "Copper" at 1289.05,-2098.33 h60
  text "0.035mm" at 2148.81,-2098.33 h60
  text "10" at -50.61,-2218.33 h60
  text "Dielectric 4" at 359.3,-2218.33 h60
  text "FR-4" at 1289.05,-2218.33 h60
  text "0.300mm" at 2148.81,-2218.33 h60
  text "3.96" at 2798.65,-2218.33 h60
  text "11" at -50.61,-2338.33 h60
  text "5-SIG-VERT" at 359.3,-2338.33 h60
  text "Copper" at 1289.05,-2338.33 h60
  text "0.035mm" at 2148.81,-2338.33 h60
  text "12" at -50.61,-2458.33 h60
  text "Dielectric 5" at 359.3,-2458.33 h60
  text "FR-4" at 1289.05,-2458.33 h60
  text "0.105mm" at 2148.81,-2458.33 h60
  text "4.29" at 2798.65,-2458.33 h60
  text "13" at -50.61,-2578.33 h60
  text "6-GND-BOT" at 359.3,-2578.33 h60
  text "Copper" at 1289.05,-2578.33 h60
  text "0.035mm" at 2148.81,-2578.33 h60
  text "14" at -50.61,-2698.33 h60
  text "Bottom Solder" at 359.3,-2698.33 h60
  text "Solder Resist" at 1289.05,-2698.33 h60
  text "0.020mm" at 2148.81,-2698.33 h60
  text "3.5" at 2798.65,-2698.33 h60
  text "15" at -50.61,-2818.33 h60
  text "Bottom Overlay" at 359.3,-2818.33 h60

## Dimensions
3661.42,39.37 to 3393.7,-251.97 on Dimensions
39.37,2716.54 to -93.98,2947.5 on Dimensions
3661.42,0 to 3700,250 on Fiducials
39.37,0 to 100,300 on Fiducials
0,2716.54 to 100,2475 on Fiducials
0,39.37 to 100,300 on Fiducials
3897.64,0 to 3818.9,118.11 on Dimensions
0,39.37 to 118.11,118.11 on Dimensions
39.37,0 to 118.11,118.11 on Dimensions
2244.09,39.37 to 2429.13,-114.17 on Dimensions

## Text inside footprints (layer, text, board x,y; h text height)
B1: BOT ASSY "+" at 2050,1530 h40; Bottom Overlay "+" at 1995,1480 h40
C13: Top Overlay "+" at 1070,340 h40; TOP ASSY "+" at 1035,230 h40
C14: Top Overlay "+" at 1050,1065 h40; TOP ASSY "+" at 1035,930 h40
C15: Top Overlay "+" at 1070,740 h40; TOP ASSY "+" at 1035,630 h40
C25: Top Overlay "+" at 3770,1970 h40 r270; TOP ASSY "+" at 3685,1985 h40
C26: Top Overlay "+" at 3820,1840 h40 r90; TOP ASSY "+" at 3720,1785 h40 r90
C127: BOT ASSY "+" at 1550,2300 h40; Bottom Overlay "+" at 1575,2260 h40
Ground&PowerPlanes_1: 1-SIG-TOP "1" at 2457.68,234.25 h78.74
Ground&PowerPlanes_2: 2-GND "2" at 2542.32,234.25 h78.74; 2-GND "2" at 2542.32,234.25 h78.74
Ground&PowerPlanes_3: 3-PWR "3" at 2632.02,234.33 h78.74; 3-PWR "3" at 2632.02,234.33 h78.74
Ground&PowerPlanes_4: 4-SIG-HOR "4" at 2716.26,234.25 h78.74
Ground&PowerPlanes_5: 5-SIG-VERT "5" at 2806.26,234.25 h78.74
Ground&PowerPlanes_6: 6-GND-BOT "6" at 2896.26,234.25 h78.74
L5: TOP ASSY "4" at 1560,340 h19.68; TOP ASSY "3" at 1475,340 h19.68; TOP ASSY "2" at 1480,650 h19.68; TOP ASSY "1" at 1560,650 h19.68
LD1: BOT ASSY "A" at 226.18,1542.87 h19.68
Logo1: Bottom Overlay "Acme" at 3808.94,953.15 h98.43 r270; Bottom Overlay "CPU" at 3667.2,1150 h98.43 r270
OLED: BOT ASSY "30" at 2775,1725 h40 r270; BOT ASSY "1" at 2780,970 h40 r270
P10: BOT ASSY "B1" at 199.21,947.44 h19.68 r270; BOT ASSY "B12" at 200.79,668.31 h19.68 r270; BOT ASSY "A12" at 335.43,930.91 h19.68 r270; BOT ASSY "A1" at 335.83,686.42 h19.68 r270
P16: TOP ASSY "4" at 1375,105 h40; TOP ASSY "3" at 1315,105 h40; TOP ASSY "2" at 1255,105 h40; TOP ASSY "1" at 1205,105 h40
P18: TOP ASSY "1" at 560,110 h40; TOP ASSY "2" at 615,110 h40; TOP ASSY "3" at 675,110 h40
P19.1: TOP ASSY "2" at 395,110 h40; TOP ASSY "1" at 340,110 h40
P20: TOP ASSY "5" at 975,2620 h19.68; TOP ASSY "1" at 1065,2620 h19.68
P22: TOP ASSY "1" at 1555,105 h40; TOP ASSY "2" at 1600,105 h40; TOP ASSY "3" at 1660,105 h40; TOP ASSY "4" at 1720,105 h40; TOP ASSY "5" at 1780,105 h40
P24: BOT ASSY "+" at 2232.87,2710.24 h19.68 r90; Bottom Overlay "+" at 2197.44,2718.11 h40 r90
P25: TOP ASSY "1" at 1980,105 h40; TOP ASSY "2" at 2035,105 h40; TOP ASSY "3" at 2090,105 h40; TOP ASSY "4" at 2150,105 h40
P28: TOP ASSY "5" at 570,2620 h19.68; TOP ASSY "1" at 665,2620 h19.68
P102: BOT ASSY "1" at 3834.65,485.83 h39.37 r270; BOT ASSY "8" at 3832.05,780 h39.37 r270
TFT: TOP ASSY "22" at 2717.76,447.44 h39.37; TOP ASSY "1" at 3152.76,447.44 h39.37; BOT ASSY "Top Left Corner" at 3535.43,2118.11 h39.37; BOT ASSY "Center of the screen" at 3303.15,1401.57 h39.37; BOT ASSY "Center of the panel" at 3311.02,1244.09 h39.37
U10: BOT ASSY "S1" at 3777.91,2054.09 h19.68 r270; BOT ASSY "S2" at 3727.91,2059.09 h19.68 r270; BOT ASSY "S3" at 3777.91,2399.09 h19.68 r270; BOT ASSY "S4" at 3682.91,2059.09 h19.68 r270; BOT ASSY "S5" at 3727.91,2399.09 h19.68 r270; BOT ASSY "S6" at 3682.91,2399.09 h19.68 r270
X1: BOT ASSY "6" at 1956.69,1040.75 h19.68; BOT ASSY "5" at 1956.69,989.57 h19.68; BOT ASSY "4" at 2007.87,1040.75 h19.68; BOT ASSY "3" at 2007.87,989.57 h19.68; BOT ASSY "2" at 2059.06,1040.75 h19.68; BOT ASSY "1" at 2055.12,989.57 h19.68
X2: BOT ASSY "1" at 2055.12,2339.57 h19.68; BOT ASSY "2" at 2059.06,2390.75 h19.68; BOT ASSY "3" at 2007.87,2339.57 h19.68; BOT ASSY "4" at 2007.87,2390.75 h19.68; BOT ASSY "5" at 1956.69,2339.57 h19.68; BOT ASSY "6" at 1956.69,2390.75 h19.68
X4: TOP ASSY "1" at 350,2600 h40; TOP ASSY "2" at 285,2600 h40
X5: BOT ASSY "1" at 820,340 h40; BOT ASSY "8" at 1103,338 h40; Bottom Overlay "8" at 1146.42,267.48 h40; Bottom Overlay "1" at 792.32,265.71 h40
X8: BOT ASSY "10" at 2140.55,2161.81 h19.68 r270; BOT ASSY "1" at 2140.55,2122.44 h19.68 r270; BOT ASSY "9" at 2089.37,2169.68 h19.68 r270; BOT ASSY "2" at 2089.37,2118.5 h19.68 r270; BOT ASSY "8" at 2042.13,2169.68 h19.68 r270; BOT ASSY "3" at 2042.13,2118.5 h19.68 r270; BOT ASSY "7" at 1990.94,2169.68 h19.68 r270; BOT ASSY "4" at 1990.94,2114.57 h19.68 r270; BOT ASSY "5" at 1939.76,2118.5 h19.68 r270; BOT ASSY "6" at 1943.7,2169.68 h19.68 r270
X9: BOT ASSY "1" at 2055.12,1214.57 h19.68; BOT ASSY "2" at 2059.06,1265.75 h19.68; BOT ASSY "3" at 2007.87,1214.57 h19.68; BOT ASSY "4" at 2007.87,1265.75 h19.68; BOT ASSY "5" at 1956.69,1214.57 h19.68; BOT ASSY "6" at 1956.69,1265.75 h19.68
X10: BOT ASSY "6" at 1956.69,815.75 h19.68; BOT ASSY "5" at 1956.69,764.57 h19.68; BOT ASSY "4" at 2007.87,815.75 h19.68; BOT ASSY "3" at 2007.87,764.57 h19.68; BOT ASSY "2" at 2059.06,815.75 h19.68; BOT ASSY "1" at 2055.12,764.57 h19.68